# EAGLE board 555 (EAGLE 7.1.0)
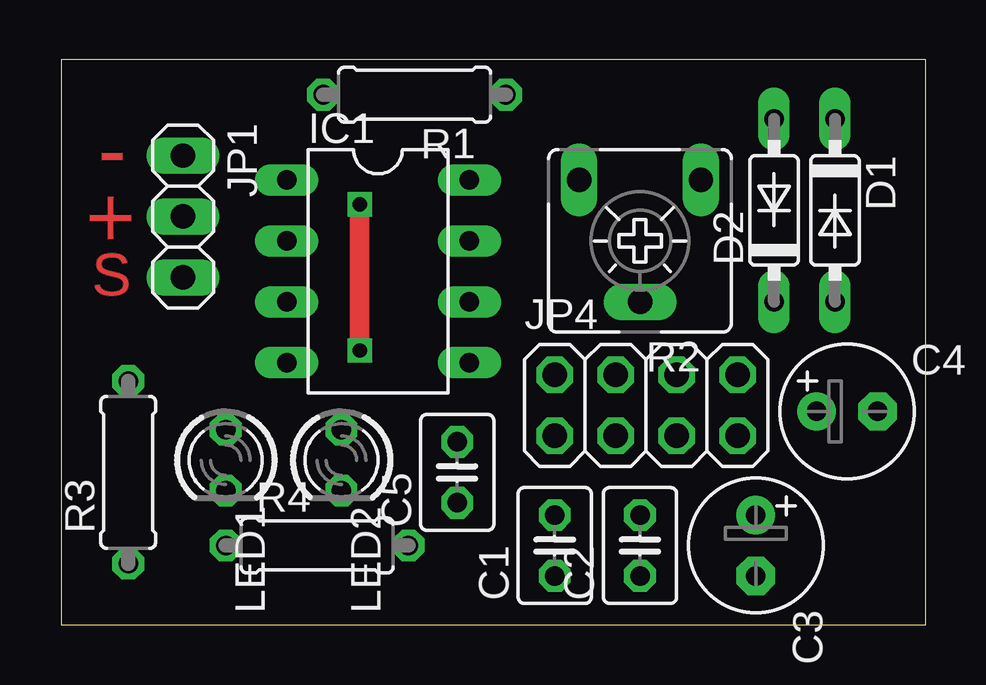
[diagram p0: board, top side]
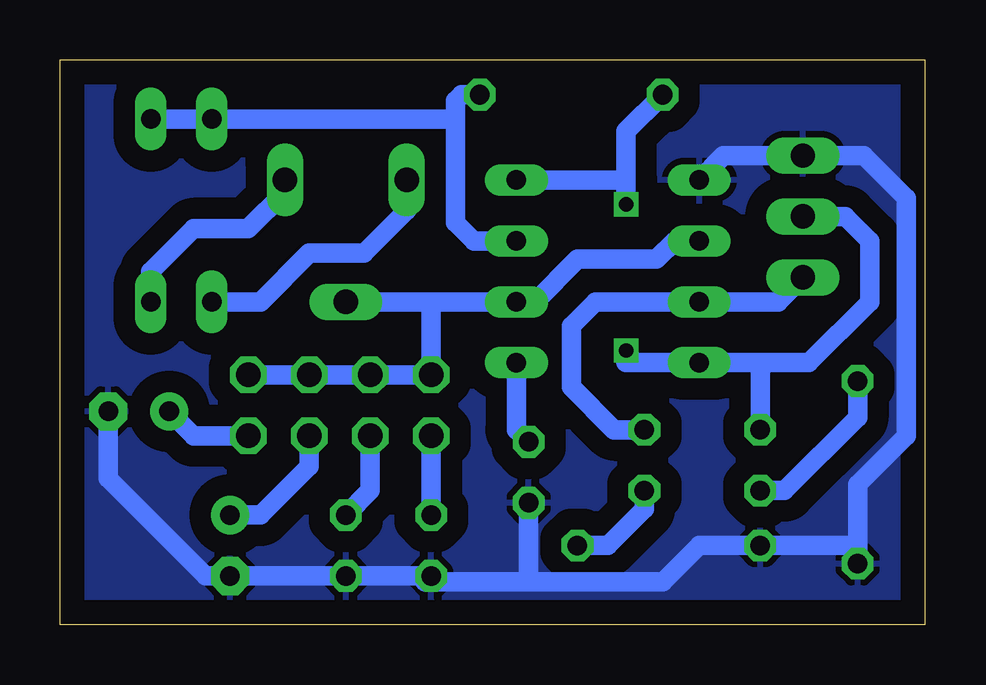
[diagram p1: board, bottom side, seen from below]

Size 36.05 x 23.55 mm. Coordinates in mm from the lower left corner, seen from the top.
Outline: 0,0 36.05,0 36.05,23.55 0,23.55 0,0
Copper layers (1*16): Top 0.035mm / dielectric 1.5mm / Bottom 0.035mm
Design rules "default *": minimum track width 10mil, minimum drill 24mil, track to track 35mil, track to pad 35mil, pad to pad 8mil, via to via 8mil, smd to smd 8mil, copper to edge 40mil, drill to drill 8mil, minimum pad ring 10mil, minimum via ring 8mil, stop-mask expansion 4mil, vias tented up to drill 0mil, thermal gap 10mil

## Footprints (pad centres in the part's own frame; a part is rotated, then mirrored left to right if it is on the bottom)
C025-030X050 = drill 0.813 octagon: 1 -1.27,0; 2 1.27,0
E2,5-6 = drill 0.813 pad 1.6: + -1.27,0 | drill 0.813 pad 1.6 octagon: - 1.27,0
DO35-7 = drill 0.813 long: A 3.81,0; C -3.81,0
DIL-08 = drill 0.813 long: 1 -3.81,-3.81; 2 -1.27,-3.81; 3 1.27,-3.81; 4 3.81,-3.81; 5 3.81,3.81; 6 1.27,3.81; 7 -1.27,3.81; 8 -3.81,3.81
1X03 = drill 1.016 long: 1 -2.54,0; 2 0,0; 3 2.54,0
2X04 = drill 1.016 octagon: 1 -3.81,-1.27; 2 -3.81,1.27; 3 -1.27,-1.27; 4 -1.27,1.27; 5 1.27,-1.27; 6 1.27,1.27; 7 3.81,-1.27; 8 3.81,1.27
LED3MM = drill 0.813 octagon: A -1.27,0; K 1.27,0
0207/7 = drill 0.813 octagon: 1 -3.81,0; 2 3.81,0
CA6V = drill 1.016 long: A -2.54,-2.54; E 2.54,-2.54; S 0,2.54

## Placement (x,y rotation side)
C1  [C025-030X050]  20.57,3.3 90 top
C2  [C025-030X050]  24.13,3.3 90 top
C3  [E2,5-6]  28.96,3.3 270 top
C4  [E2,5-6]  32.77,8.89 0 top
C5  10nF  [C025-030X050]  16.51,6.35 90 top
D1  [DO35-7]  32.26,17.27 270 top
D2  [DO35-7]  29.72,17.27 90 top
IC1  NE555  [DIL-08]  13.21,14.73 270 top
JP1  [1X03]  5.08,17.02 270 top
JP4  [2X04]  24.38,9.14 0 top
LED1  [LED3MM]  6.86,6.86 270 top
LED2  [LED3MM]  11.68,6.86 270 top
R1  1K  [0207/7]  14.73,22.1 180 top
R2  10K  [CA6V]  24.13,16 180 top
R3  330  [0207/7]  2.79,6.35 90 top
R4  330  [0207/7]  10.67,3.3 0 top

## Library data of the parts
C1-C5 R1 R3 R4 = rcl
D1 D2 = diode
IC1 = st-microelectronics; MF: Arrow Electronics; MPN: NE555N; OC_FARNELL: 1467742; OC_NEWARK: 89K1486
JP1 JP4 = pinhead
LED1 LED2 = led
R2 = pot

## Nets
5V: IC1.4 IC1.8 JP1.2 LED1.A R1.2
GND: C1.1 C2.1 C3.- C4.- C5.1 IC1.1 JP1.1 R3.1 R4.1
N$1: LED1.K R3.2
N$2: C5.2 IC1.5
N$3: IC1.2 IC1.6 JP4.2 JP4.4 JP4.6 JP4.8 R2.S
N$4: D1.C D2.A IC1.7 R1.1
N$5: D1.A R2.A
N$6: D2.C R2.E
N$8: C1.2 JP4.1
N$9: C4.+ JP4.7
N$10: C2.2 JP4.3
N$11: C3.+ JP4.5
N$13: LED2.K R4.2
OUT: IC1.3 JP1.3 LED2.A

## Tracks (layer width: path | path; a pad name or v marks a point on that pad's centre or on a via)
5V  (via drill 0.6)
  Top 0.813: v12.45,11.43 v12.45,17.53
  Bottom 0.813: JP1.2 3.3,17.02 2.29,16 2.29,13.46 4.83,10.92 6.6,10.92 | 6.6,10.92 IC1.4 12.45,10.92 v12.45,11.43 | LED1.A 6.86,10.67 6.6,10.92 | v12.45,17.53 12.45,18.54 | 12.45,18.54 12.45,20.57 R1.2 | IC1.8 12.45,18.54
GND
  Bottom 0.813: C1.1 21.08,2.03 | 21.08,2.03 C2.1 C3.- 29.97,2.03 34.04,6.1 C4.- | 16.51,4.83 C5.1 16.51,1.78 | IC1.1 8.38,19.56 JP1.1 2.54,19.56 0.76,17.78 0.76,7.87 2.79,5.84 2.79,3.3 | 16.51,1.78 10.92,1.78 9.4,3.3 R4.1 2.79,3.3 | 16.51,1.78 20.83,1.78 21.08,2.03 | R3.1 2.79,3.3
  pour Bottom: 0,23.62 36.07,23.62 36.07,0 0,0
N$1
  Bottom 0.813: R3.2 2.79,8.64 5.84,5.59 LED1.K
N$2
  Bottom 0.813: IC1.5 17.02,8.13 C5.2
N$3
  Bottom 0.813: 20.57,13.46 IC1.6 16.26,13.46 14.48,15.24 11.18,15.24 10.41,16 IC1.2 | 20.57,13.46 R2.S | 20.57,13.46 JP4.2 JP4.4 JP4.6 JP4.8
N$4
  Bottom 0.813: D1.C D2.A 19.81,21.08 19.56,21.34 | IC1.7 18.8,16 19.56,16.76 19.56,21.34 | 19.56,21.34 19.56,21.84 19.3,22.1 R1.1
N$5
  Bottom 0.813: R2.A 26.67,18.03 28.19,16.51 30.48,16.51 32.26,14.73 D1.A
N$6
  Bottom 0.813: D2.C 27.69,13.46 25.65,15.49 23.37,15.49 21.59,17.27 R2.E
N$8
  Bottom 0.813: JP4.1 C1.2
N$9
  Bottom 0.813: JP4.7 30.48,7.87 C4.+
N$10
  Bottom 0.813: JP4.3 23.11,5.59 C2.2
N$11
  Bottom 0.813: JP4.5 25.65,6.6 27.69,4.57 C3.+
N$13
  Bottom 0.813: LED2.K 11.68,4.83 13.21,3.3 R4.2
OUT
  Bottom 0.813: JP1.3 6.1,13.46 IC1.3 13.72,13.46 14.73,12.45 14.73,9.91 12.95,8.13 LED2.A

## Text on the board
Top: - | + | S